# EAGLE board Arduino-Pro-Mini (EAGLE 7.6.0)
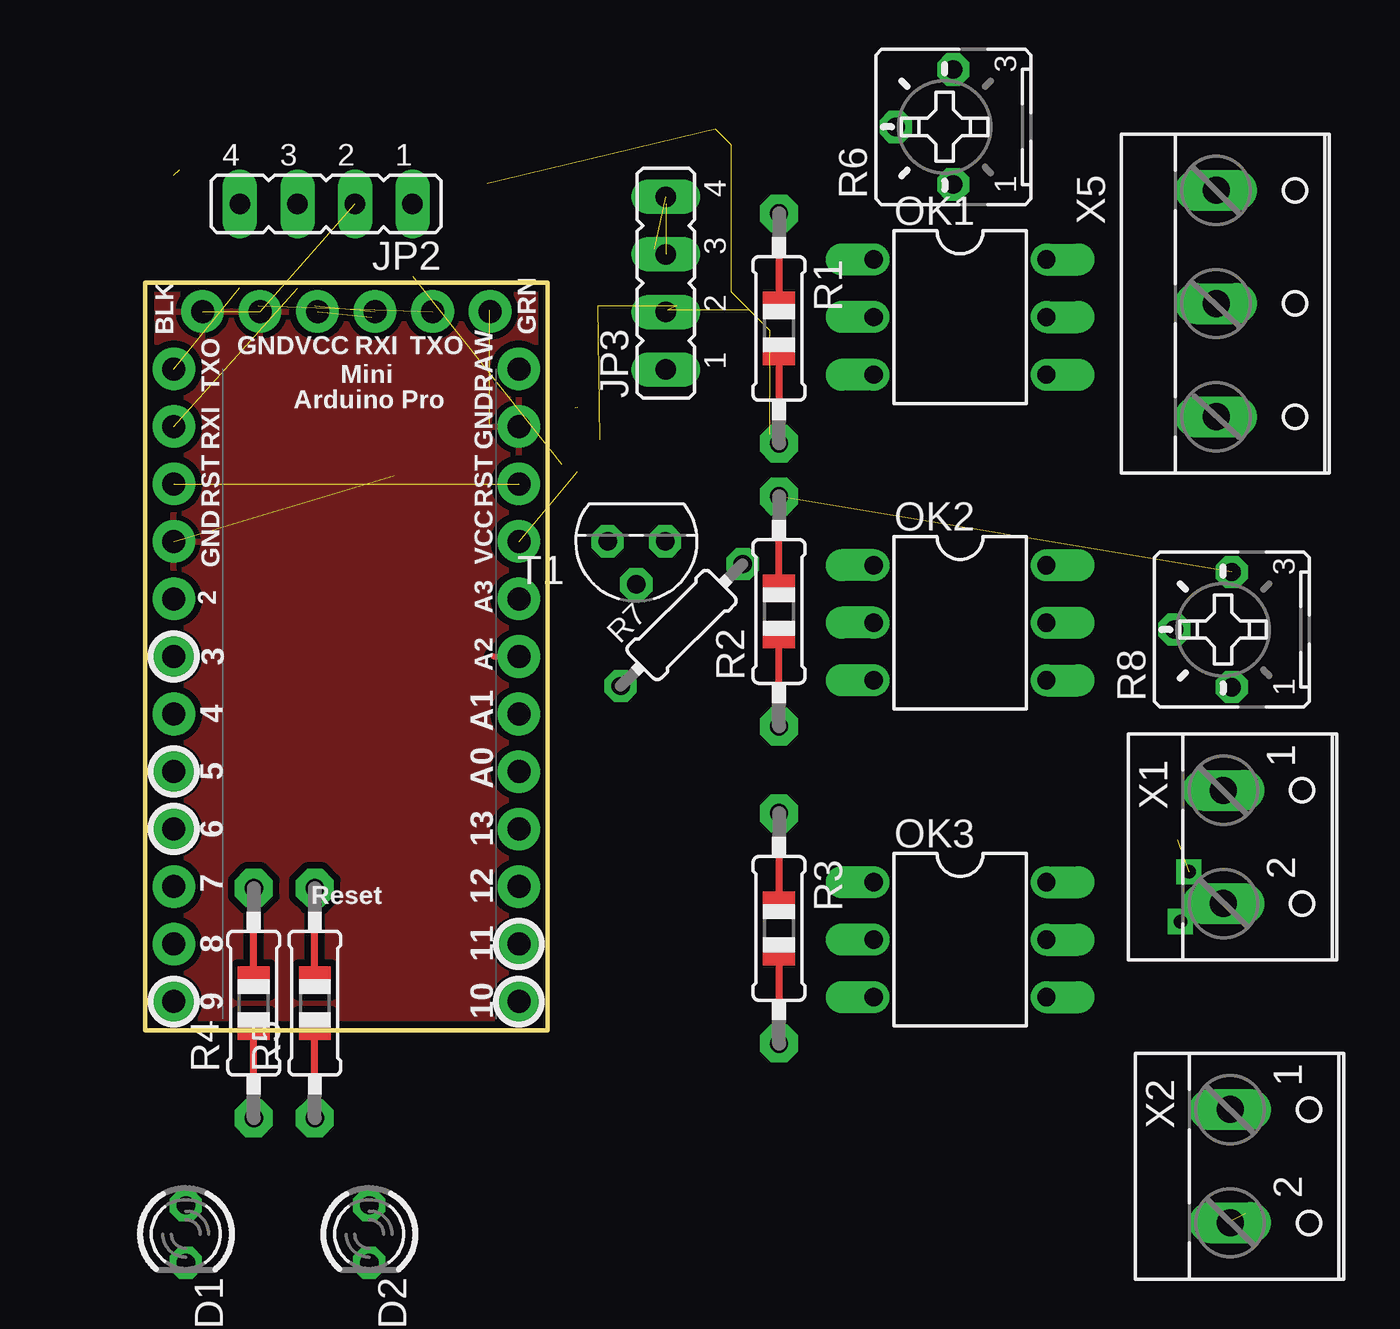
[diagram p0: board, top side]
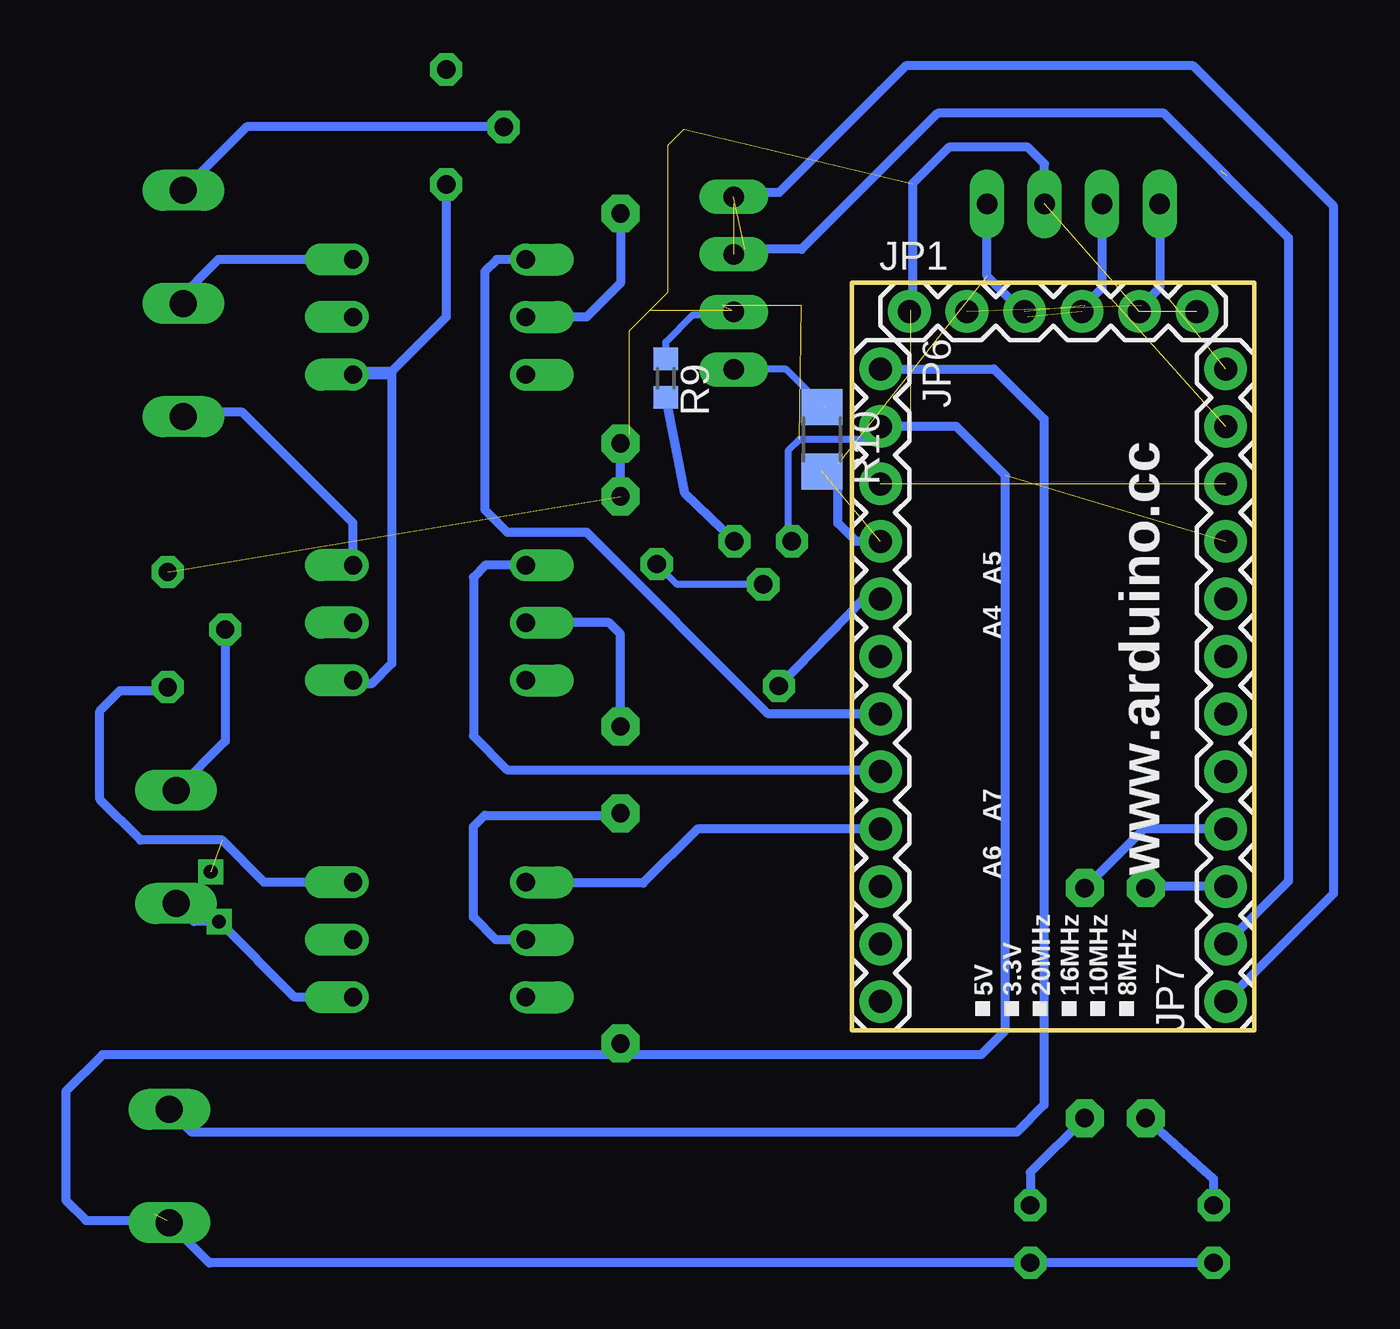
[diagram p1: board, bottom side, seen from below]

Size 17.78 x 33.02 mm. Coordinates in mm from the lower left corner, seen from the top.
Outline: 0,33.02 0,0 17.78,0 17.78,33.02 0,33.02
Copper layers (1*16): Top 0.035mm / dielectric 1.5mm / Bottom 0.035mm
Design rules "SparkFun-2-layer *": minimum track width 7mil, minimum drill 15mil, track to track 8mil, track to pad 8mil, pad to pad 8mil, via to via 8mil, smd to smd 8mil, copper to edge 8mil, drill to drill 8mil, minimum pad ring 12mil, minimum via ring 10mil, stop-mask expansion 4mil, vias tented up to drill 20mil, thermal gap 10mil
Net classes: 0 default: width 0.203 mm; 1 vcc: width 0.254 mm

## Footprints (pad centres in the part's own frame; a part is rotated, then mirrored left to right if it is on the bottom)
1X06 = drill 1.016 pad 1.88: 1 0,0; 2 2.54,0; 3 5.08,0; 4 7.62,0; 5 10.16,0; 6 12.7,0
JP4 = drill 0.914 long: 1 -3.81,0; 2 -1.27,0; 3 1.27,0; 4 3.81,0
1X12 = drill 1.016 pad 1.88: 1 0,0; 2 2.54,0; 3 5.08,0; 4 7.62,0; 5 10.16,0; 6 12.7,0; 7 15.24,0; 8 17.78,0; 9 20.32,0; 10 22.86,0; 11 25.4,0; 12 27.94,0
LED3MM = drill 0.813 octagon: A -1.27,0; K 1.27,0
DIL06 = drill 0.813 offset: 1 -2.54,-3.81; 2 0,-3.81; 3 2.54,-3.81; 4 2.54,3.81; 5 0,3.81; 6 -2.54,3.81
0805-THM = drill 0.813 pad 1.676 octagon: 1 -5.08,0; 2 5.08,0
B25P = drill 0.813 octagon: A -2.54,0; E 2.54,0; S 0,2.54
0204/7 = drill 0.813 octagon: 1 -3.81,0; 2 3.81,0
R0603 = smd 1 x 1.1: 1 -0.85,0; 2 0.85,0
R1206 = smd 1.6 x 1.803: 1 -1.422,0; 2 1.422,0
TO92 = drill 0.813 octagon: 1 1.27,0; 2 0,1.905; 3 -1.27,0
W237-102 = drill 1.194 long: 1 -2.5,-1.27; 2 2.5,-1.27
W237-103 = drill 1.194 long: 1 -5,-1.29; 2 0,-1.29; 3 5,-1.29

## Placement (x,y rotation side)
FRAME1  FRAME-LETTER  [CREATIVE_COMMONS]  -13.48,-9.39 0 top  (outside the outline)
JP1  FTDI Basic  [1X06]  15.24,31.75 0 bottom
JP2  [JP4]  8,36.5 180 top  (outside the outline)
JP3  [JP4]  23,33 90 top  (outside the outline)
JP6  [1X12]  16.51,29.21 270 bottom
JP7  [1X12]  1.27,1.27 90 bottom
LED1  [LED3MM]  1.8,-9 270 top  (outside the outline)
LED2  [LED3MM]  9.9,-9 270 top  (outside the outline)
OK1  MOC3020M  [DIL06]  36,31.5 270 top  (outside the outline)
OK2  MOC3020M  [DIL06]  36,18 270 top  (outside the outline)
OK3  MOC3020M  [DIL06]  36,4 270 top  (outside the outline)
R1  [0805-THM]  28,31 270 top  (outside the outline)
R2  [0805-THM]  28,18.5 90 top  (outside the outline)
R3  [0805-THM]  28,4.5 270 top  (outside the outline)
R4  [0805-THM]  4.8,1.2 90 top
R5  [0805-THM]  7.5,1.2 90 top
R6  [B25P]  35.7,39.9 90 top  (outside the outline)
R7  [0204/7]  23.7,17.9 45 top  (outside the outline)
R8  [B25P]  48,17.7 90 top  (outside the outline)
R9  [R0603]  26,28.8 270 bottom  (outside the outline)
R10  [R1206]  19.1,26.1 270 bottom
T1  BC547  [TO92]  21.7,21.6 180 top
X1  [W237-102]  48.9,8.1 270 top  (outside the outline)
X2  [W237-102]  49.2,-6 270 top  (outside the outline)
X5  [W237-103]  48.6,32.1 270 top  (outside the outline)

## Library data of the parts
FRAME1 = SparkFun-Aesthetics
JP1 JP6 JP7 = SparkFun
JP2 JP3 = jumper
LED1 LED2 = led
OK1-OK3 = optocoupler; MF: FAIRCHILD SEMICONDUCTOR; MPN: MOC3020-M; OC_FARNELL: 1505425; OC_NEWARK: 72K8895
R1-R5 = adafruit
R6 R8 = pot
R7 R9 R10 = eagle-ltspice; SPICEMODEL: NONE; SPICEPREFIX: R
T1 = transistor
X1 X2 = con-wago-500; MPN: 237-102; OC_FARNELL: unknown; OC_NEWARK: 70K9898
X5 = con-wago-500; MPN: 237-103; OC_FARNELL: unknown; OC_NEWARK: 18M7116

## Nets
A0: JP6.8 OK2.1
A1: JP6.7 OK1.1
A2: JP6.6
A3: JP6.5 R7.1
D2: JP7.8
D3: JP7.7
D4: JP7.6
D5: JP7.5
D6: JP7.4 R5.2
D7: JP7.3 R4.2
D8: JP3.4 JP7.2
D9: JP3.3 JP7.1
D10: JP6.12
DTR: JP1.1
GND [vcc]: JP1.5 JP1.6 JP2.2 JP6.2 JP7.9 LED1.K LED2.K R1.2 R2.2 R3.2 R6.E R8.E T1.1 X2.2
MISO: JP6.10
MOSI: JP6.11
N$1: OK1.6 X5.2
N$2: OK2.2 R2.1
N$3: OK2.6 X5.3
N$4: OK1.2 R1.1
N$5: OK1.4 OK2.4 R6.A
N$6: OK3.2 R3.1
N$7: R6.S X5.1
N$8: OK3.4 X1.2
N$9: OK3.6 R8.A
N$10: LED1.A R4.1
N$11: LED2.A R5.1
N$12: R8.S X1.1
N$13: JP3.2 R9.1
N$14: R7.2 T1.2
N$15: JP3.1 R10.1
N$16: R9.2 T1.3
RAW [vcc]: JP6.1 X2.1
RESET: JP6.3 JP7.10
RXI: JP1.3 JP2.3 JP7.11
SCK: JP6.9 OK3.1
TXO: JP1.2 JP2.4 JP7.12
VCC: JP1.4 JP2.1 JP6.4 R10.2

## Tracks (layer width: path | path; a pad name or v marks a point on that pad's centre or on a via)
A0
  Bottom 0.406: OK2.1 33.96,20.54 34.5,20 34.5,13 33,11.5 16.58,11.5 JP6.8
A1
  Bottom 0.406: OK1.1 33.46,34.04 34,33.5 34,23 33,22 29.5,22 21.5,14 16.54,14 JP6.7
A2
  Top 0.254: 15.39,16.51 JP6.6
A3
  Top 0.254: 16.51,18.76 JP6.5 16.51,18.76
  Bottom 0.406: JP6.5 17.26,19.05 R7.1
D6
  Bottom 0.406: JP7.4 4.89,8.89 R5.2
D7
  Bottom 0.406: JP7.3 4.15,6.35 4.8,5.7 R4.2
D8  (2 unrouted)
  Bottom 0.406: 1.5,38 -1.5,35 -1.5,6.58 JP7.2 | 1.25,37.75 4,40.5 14,40.5 20,34.5 22.5,34.5 23,34
D9  (1 unrouted)
  Bottom 0.406: JP7.1 -3.5,6.04 -3.5,36.4 2.7,42.6 15.4,42.6 16.5,41.5 16.7,41.3 21,37 22.5,37 23,36.5
GND  (16 unrouted)
  Bottom 0.305: 17.08,26.1 20.1,26.1 20.6,25.6 20.6,21.77 T1.1
  Bottom 0.406: JP2.2 9.27,38.27 10,39 13.5,39 15.1,37.4 15.1,31.7 15.3,31.7 15.2,31.8 | R2.2 R1.2 27.6,26.32 | 27.5,-1.08 12.08,-1.08 11,0 11,24.5 13.17,26.67 JP6.2 17.08,26.1 | 27.5,-1.08 R3.2 | LED1.K LED2.K 46.16,-10.27 X2.2 48.03,-8.4 51.6,-8.4 52.5,-7.5 52.5,-2.7 50.88,-1.08 27.5,-1.08 | 48.9,-8.4 48.6,-8.1
  pour Top (isolate 0.305): 0,33.02 17.78,33.02 17.78,0 0,0
N$1
  Bottom 0.406: OK1.6 45.76,34.04 47.7,32.1 X5.2
N$2
  Bottom 0.406: OK2.2 28.5,18 28,17.5 R2.1
N$3
  Bottom 0.406: OK2.6 39.81,22.41 44.7,27.3 47.11,27.3 X5.3
N$4
  Bottom 0.406: R1.1 28,33 29.5,31.5 OK1.2
N$5
  Bottom 0.406: R6.A 35.7,31.5 38.1,29.1 | 38.1,29.1 39.67,29.1 OK1.4 38.24,28.96 38.1,29.1 | 38.1,29.1 38.1,16.2 39,15.3 39.9,15.3 40.2,15 40.2,15.3 40.5,15.6 39.95,15.6 OK2.4
N$6
  Bottom 0.406: OK3.2 33.5,4 34.5,5 34.5,9 34,9.5 28.08,9.5 R3.1
N$7
  Bottom 0.406: R6.S 44.51,39.9 X5.1
N$8  (via drill 0.6)
  Bottom 0.406: OK3.4 42.39,1.46 v45.73,4.8 46.83,4.8 X1.2
N$9  (via drill 0.6)  (1 unrouted)
  Bottom 0.406: OK3.6 43.74,6.54 45.6,8.4 49.2,8.4 51,10.2 51,14.1 50.1,15 48.16,15 R8.A
  other vias: 46.1,7
N$10
  Bottom 0.406: LED1.A 1.8,-6.58 R4.1
N$11
  Bottom 0.406: R5.1 9.9,-6.28 LED2.A
N$12
  Bottom 0.406: R8.S 45.46,12.77 X1.1
N$13
  Bottom 0.305: R9.1 26,30.4 24.8,31.6 23.13,31.6 JP3.2
N$14
  Bottom 0.305: T1.2 25.5,19.7 R7.2
N$15  (1 unrouted)
  Bottom 0.305: 19,27.5 20.7,29.2 JP3.1
N$16
  Bottom 0.406: T1.3 25.15,23.7 R9.2
RAW
  Bottom 0.406: JP6.1 11.51,29.21 9.3,27 9.3,-3.3 10.5,-4.5 46.93,-4.5 X2.1
RESET  (1 unrouted)
RXI  (2 unrouted)
  Bottom 0.406: JP2.3 6.73,32.77 7.5,32
SCK
  Bottom 0.406: JP6.9 24.61,8.89 27,6.5 32.15,6.5 OK3.1
TXO  (2 unrouted)
  Bottom 0.406: JP2.4 4.19,32.81 5,32
VCC  (3 unrouted)
  Bottom 0.406: JP2.1 11.81,33.31 10,31.5 | JP6.4 17.59,21.59 18.4,22.4 18.4,25

## Text on the board
tPlace: BLK | GRN | GND | VCC | RXI | TXO | Mini | TXO | RAW | Arduino Pro | RXI | GND | RST | RST | VCC | GND | 2 | A3 | 3 | A2 | 4 | A1 | 5 | A0 | 6 | 13 | 7 | Reset | 12 | 8 | 11 | 9 | 10
bPlace: A5 | A4 | A7 | www.arduino.cc | A6 | 8MHz | 10MHz | 16MHz | 20MHz | 3.3V | 5V
tValues: Valid combinations: | 168V / 3.3V Reg / 8MHz | 168 / 5V Reg / 16MHz | 168 / 5V Reg / 20MHz | Mark back accordingly | Arduino Pro Mini
tDocu: Original Arduino Mini Design by Team Arduino / Arduino Pro Mini Design by SparkFun Electronics / Revised by Pete Lewis